# Altium PCB PCB_OSHW_BiDi_SDI_Fiber_Converter_V4_Normal_2024-11-17.pcbdoc
Units mm, origin at the board's own origin, x right, y up, seen from the top; angles counter-clockwise.
Board outline 134.06 x 77.94 mm, 2 copper layers (Top Layer, Bottom Layer); 117 components, 56 nets, 245 pads, 146 vias.
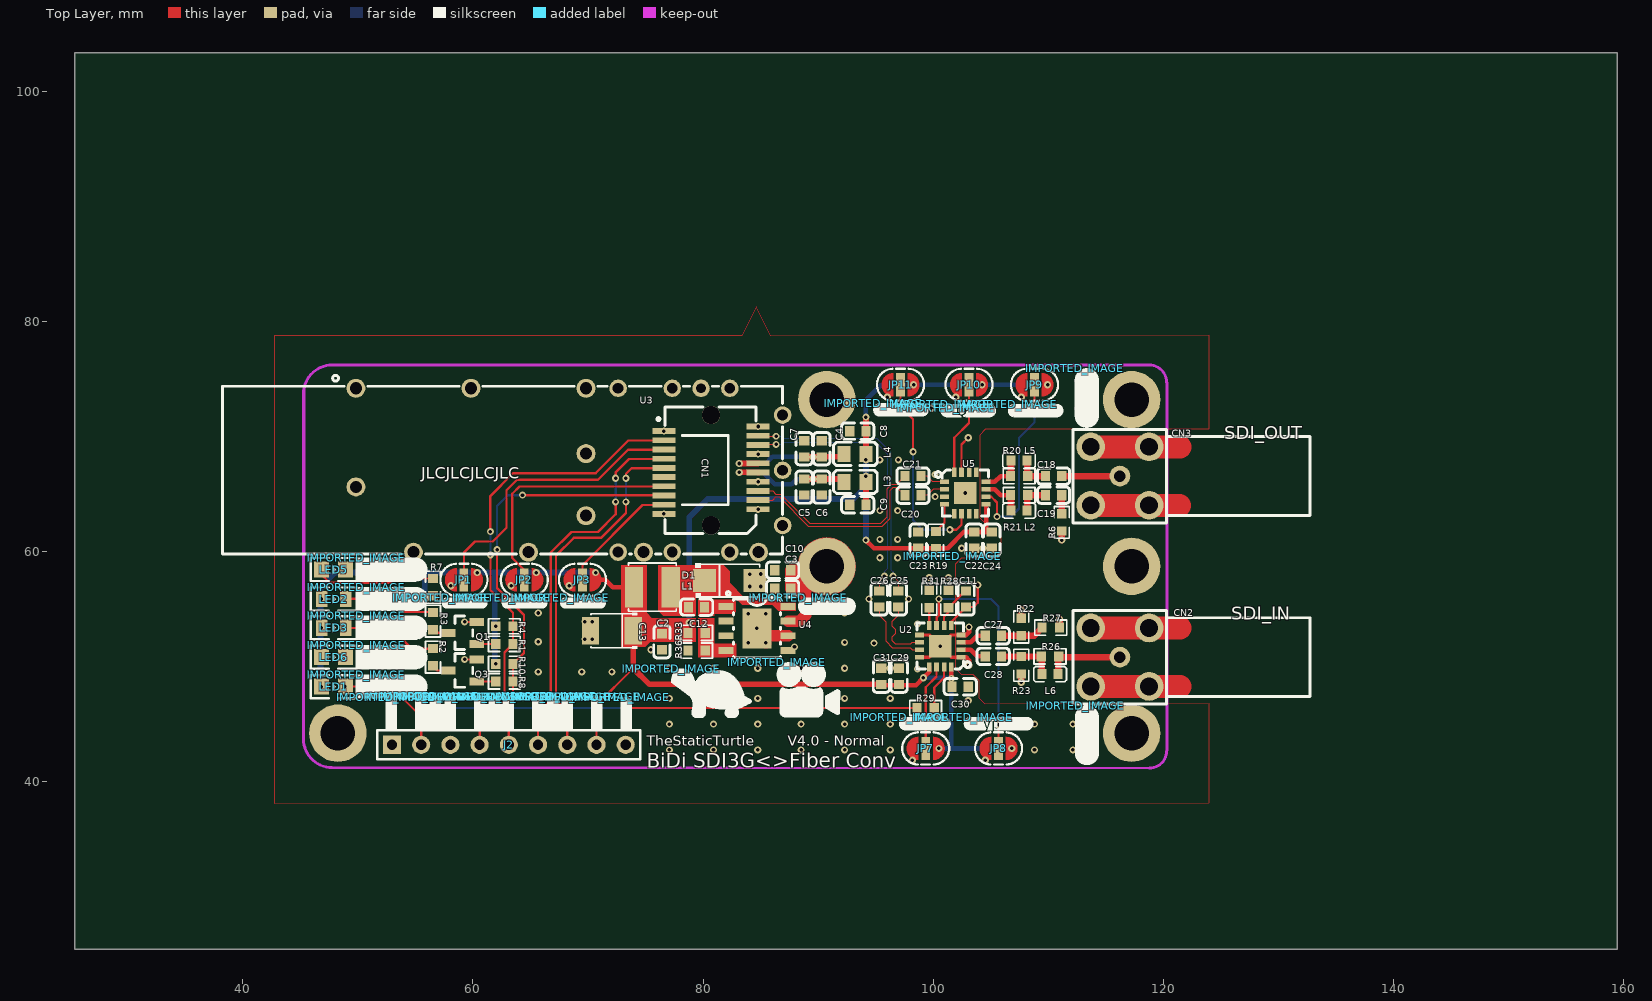
[diagram p0: Top Layer view]
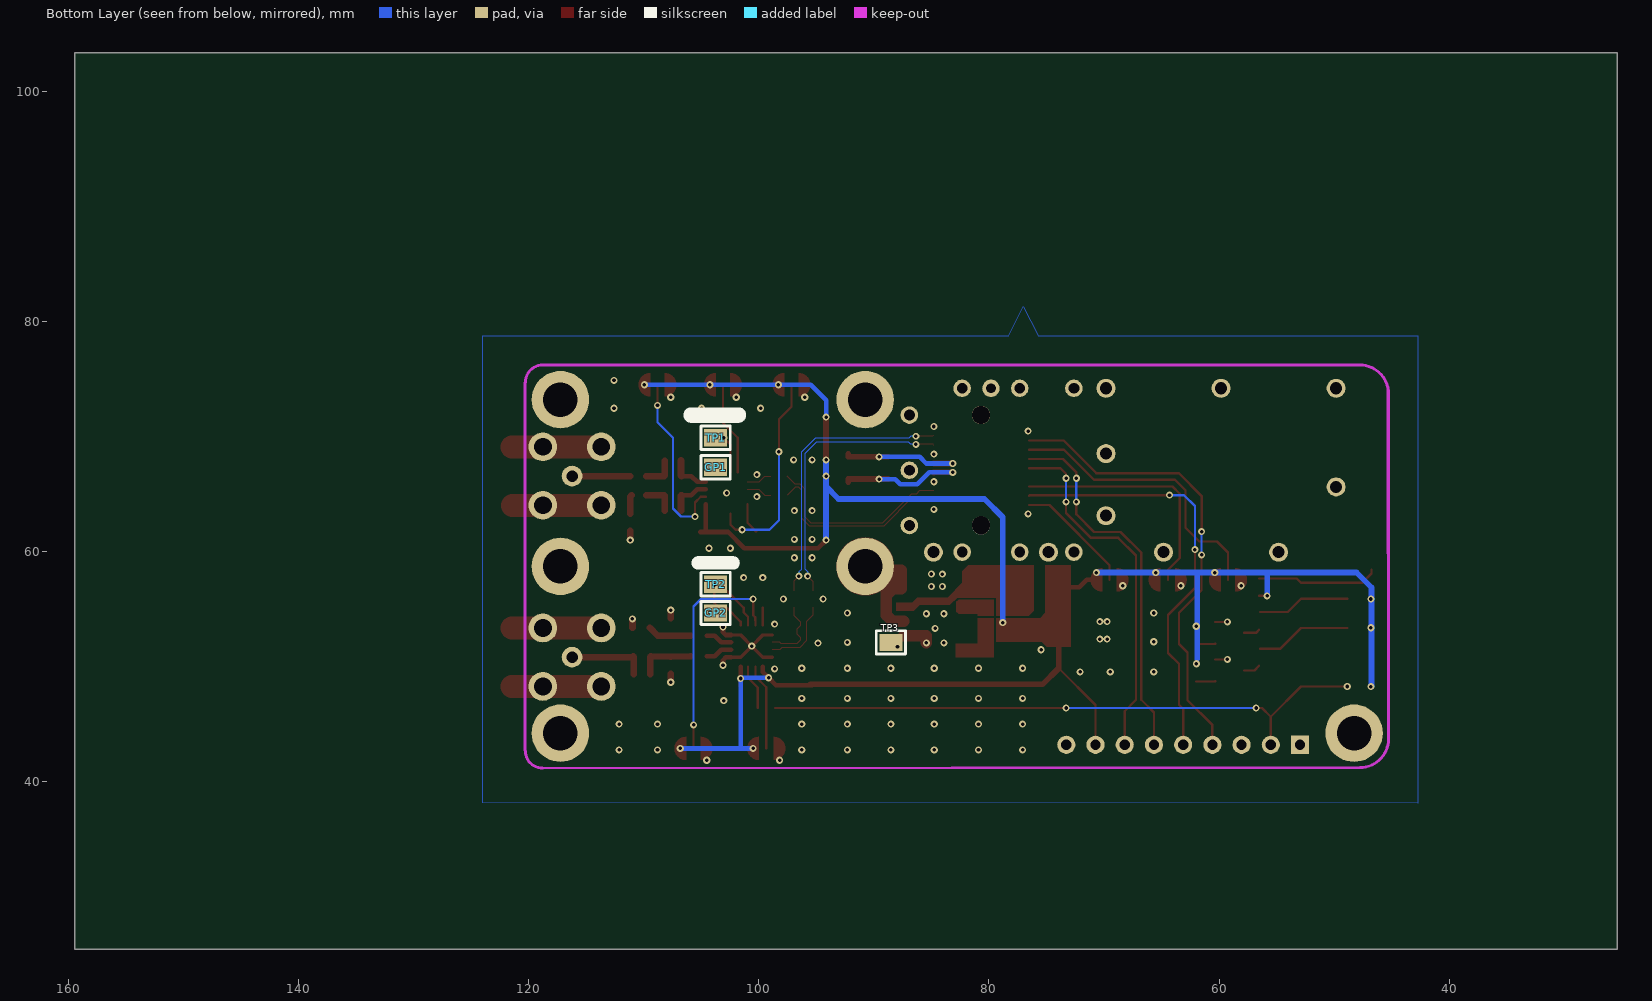
[diagram p1: Bottom Layer view, seen from below]

## Layer stack, top to bottom
Top Layer: signal copper (thickness not stored)
Dielectric: dielectric 0.32, FR-4, Dk 4.8
Bottom Layer: signal copper (thickness not stored)

## Board outline
159.461,25.4 25.4,25.4 25.4,103.338 159.461,103.338

## Components (designator, comment, footprint, x,y, rotation, side; value= is the part's Value field where it differs from the comment)
C2 "100n" C0603 76.433,52.155 r90 top
C3 "100n" C0603 86.93,56.764 r0 top
C4 "10u" C0603 90.323,68.925 r270 top
C5 "100n" C0603 88.787,65.597 r90 top
C6 "10u" C0603 90.323,65.597 r90 top
C7 "100n" C0603 88.787,68.925 r270 top
C8 "100n" C0603 93.459,70.461 r0 top
C9 "10u" C0603 93.459,64.061 r0 top
C10 "10u" C0603 86.93,58.364 r0 top
C11 "DNF" C0603 102.868,55.868 r90 top
C12 "10n" C0603 79.441,55.163 r180 top
C13 "100uF" CASE-B_3528 72.08,53.115 r180 top
C18 "4.7u" C0603 110.485,66.556 r0 top
C19 "4.7u" C0603 110.485,64.892 r0 top
C20 "4.7u" C0603 98.26,64.892 r0 top
C21 "4.7u" C0603 98.26,66.556 r0 top
C22 "10u" C0603 103.572,60.988 r90 top
C23 "10n" C0603 98.708,60.988 r270 top
C24 "100n" C0603 105.109,60.988 r90 top
C25 "4.7u" C0603 96.98,55.868 r270 top
C26 "4.7u" C0603 95.315,55.868 r270 top
C27 "1u" C0603 105.238,52.667 r0 top
C28 "1u" C0603 105.238,50.874 r0 top
C29 "10n" C0603 97.044,49.147 r270 top
C30 "10n" C0603 102.356,48.251 r180 top
C31 "10u" C0603 95.507,49.147 r270 top
CN1 "HC-SFP-20P" CONN-SMD_20P-P0.80_HCTL_HC-SFP-20P 80.696,67.064 r270 top
CN2 "SDI_IN" AMPHENOLRF_034-1030-12G 116.246,50.811 r0 top
CN3 "SDI_OUT" AMPHENOLRF_034-1030-12G 116.246,66.557 r0 top
D1 "SS34" SMA_L4.3-W2.6-LS5.2-RD 82.322,57.468 r0 top
GP1 "TEST-POINT-PTH-1X1" TESTPOINT-SMD_L1.6-W0.8_RCU-0C 103.764,67.325 r0 bottom
GP2 "TEST-POINT-PTH-1X1" TESTPOINT-SMD_L1.6-W0.8_RCU-0C 103.764,54.651 r0 bottom
IMPORTED_IMAGE "IMPORTED_IMAGE" IMPORTED_IMAGE 101.129,72.51 r0 top
IMPORTED_IMAGE "IMPORTED_IMAGE" IMPORTED_IMAGE 101.688,59.568 r0 top
IMPORTED_IMAGE "IMPORTED_IMAGE" IMPORTED_IMAGE 49.862,49.283 r0 top
IMPORTED_IMAGE "IMPORTED_IMAGE" IMPORTED_IMAGE 49.862,51.835 r0 top
IMPORTED_IMAGE "IMPORTED_IMAGE" IMPORTED_IMAGE 49.862,54.403 r0 top
IMPORTED_IMAGE "IMPORTED_IMAGE" IMPORTED_IMAGE 49.862,56.9 r0 top
IMPORTED_IMAGE "IMPORTED_IMAGE" IMPORTED_IMAGE 49.862,59.452 r0 top
IMPORTED_IMAGE "IMPORTED_IMAGE" IMPORTED_IMAGE 97.056,45.593 r0 top
IMPORTED_IMAGE "IMPORTED_IMAGE" IMPORTED_IMAGE 102.687,45.593 r0 top
IMPORTED_IMAGE "IMPORTED_IMAGE" IMPORTED_IMAGE 112.333,75.914 r0 top
IMPORTED_IMAGE "IMPORTED_IMAGE" IMPORTED_IMAGE 112.342,46.595 r0 top
IMPORTED_IMAGE "IMPORTED_IMAGE" IMPORTED_IMAGE 94.81,72.876 r0 top
IMPORTED_IMAGE "IMPORTED_IMAGE" IMPORTED_IMAGE 100.662,72.812 r0 top
IMPORTED_IMAGE "IMPORTED_IMAGE" IMPORTED_IMAGE 106.515,72.812 r0 top
IMPORTED_IMAGE "IMPORTED_IMAGE" IMPORTED_IMAGE 62.515,55.996 r0 top
IMPORTED_IMAGE "IMPORTED_IMAGE" IMPORTED_IMAGE 57.308,55.996 r0 top
IMPORTED_IMAGE "IMPORTED_IMAGE" IMPORTED_IMAGE 67.595,55.996 r0 top
IMPORTED_IMAGE "IMPORTED_IMAGE" IMPORTED_IMAGE 52.43,47.343 r0 top
IMPORTED_IMAGE "IMPORTED_IMAGE" IMPORTED_IMAGE 54.99,47.383 r0 top
IMPORTED_IMAGE "IMPORTED_IMAGE" IMPORTED_IMAGE 60.111,47.377 r0 top
IMPORTED_IMAGE "IMPORTED_IMAGE" IMPORTED_IMAGE 62.607,47.37 r0 top
IMPORTED_IMAGE "IMPORTED_IMAGE" IMPORTED_IMAGE 65.168,47.383 r0 top
IMPORTED_IMAGE "IMPORTED_IMAGE" IMPORTED_IMAGE 67.728,47.383 r0 top
IMPORTED_IMAGE "IMPORTED_IMAGE" IMPORTED_IMAGE 66.448,47.434 r0 top
IMPORTED_IMAGE "IMPORTED_IMAGE" IMPORTED_IMAGE 70.288,47.383 r0 top
IMPORTED_IMAGE "IMPORTED_IMAGE" IMPORTED_IMAGE 72.849,47.343 r0 top
IMPORTED_IMAGE "IMPORTED_IMAGE" IMPORTED_IMAGE 61.391,47.383 r0 top
IMPORTED_IMAGE "IMPORTED_IMAGE" IMPORTED_IMAGE 56.242,47.407 r0 top
IMPORTED_IMAGE "IMPORTED_IMAGE" IMPORTED_IMAGE 57.551,47.383 r0 top
IMPORTED_IMAGE "IMPORTED_IMAGE" IMPORTED_IMAGE 77.222,49.821 r0 top
IMPORTED_IMAGE "IMPORTED_IMAGE" IMPORTED_IMAGE 86.413,50.365 r0 top
IMPORTED_IMAGE "IMPORTED_IMAGE" IMPORTED_IMAGE 88.278,55.966 r0 top
J2 "HDR-M-2.54_1x9" HDR-M-2.54_1X9 63.119,43.194 r0 top
JP1 "SOLDER BRIDGE 3P" "SOLDER BRIDGE 3P" 59.215,57.532 r270 top
JP2 "SOLDER BRIDGE 3P" "SOLDER BRIDGE 3P" 64.464,57.532 r270 top
JP3 "SOLDER BRIDGE 3P" "SOLDER BRIDGE 3P" 69.52,57.532 r270 top
JP7 "SOLDER BRIDGE 3P" "SOLDER BRIDGE 3P" 99.357,42.874 r270 top
JP8 "SOLDER BRIDGE 3P" "SOLDER BRIDGE 3P" 105.694,42.874 r270 top
JP9 "SOLDER BRIDGE 3P" "SOLDER BRIDGE 3P" 108.821,74.494 r270 top
JP10 "SOLDER BRIDGE 3P" "SOLDER BRIDGE 3P" 103.124,74.494 r270 top
JP11 "SOLDER BRIDGE 3P" "SOLDER BRIDGE 3P" 97.172,74.494 r270 top
L1 "10uH" IND-SMD_L4.0-W4.0 75.601,56.892 r180 top
L2 "DNF" L0603 107.477,63.549 r180 top
L3 "100Ω" L0805 93.203,66.045 r180 top
L4 "100Ω" L0805 93.203,68.477 r180 top
L5 "DNF" L0603 107.477,67.901 r0 top
L6 "2.7n" L0603 110.166,49.34 r180 top
LED1 "LED_CD" LED0805_GREEN 47.885,48.251 r0 top
LED2 "LED_SFP_FAULT" LED0805_RED 47.885,55.868 r0 top
LED3 "LED_SFP_LOS" LED0805_RED 47.885,53.371 r0 top
LED5 "LED_POWER" LED0805_BLUE 47.885,58.428 r0 top
LED6 "LED_LOCK" LED0805_GREEN 47.885,50.811 r0 top
Q1 "2N3904(SOT-23)" SOT-23-3_L2.9-W1.3-P1.90-LS2.4-TR 59.087,52.923 r0 top
Q3 "2N3904(SOT-23)" SOT-23-3_L2.9-W1.3-P1.90-LS2.4-TR 59.087,49.659 r0 top
R1 "1k" R0603 62.735,51.963 r0 top
R2 "300" R0603 56.527,50.811 r270 top
R3 "300" R0603 56.527,53.947 r270 top
R4 "10k" R0603 62.735,53.499 r0 top
R6 "75" R0603 111.189,62.525 r270 top
R7 "300" R0603 56.527,56.892 r270 top
R8 "1k" R0603 62.735,48.699 r0 top
R10 "10k" R0603 62.735,50.235 r0 top
R19 "750" R0603 100.244,60.988 r90 top
R20 "25" R0603 107.477,66.557 r0 top
R21 "25" R0603 107.477,64.893 r0 top
R22 "75" R0603 107.668,53.434 r270 top
R23 "75" R0603 107.668,50.107 r90 top
R26 "75" R0603 110.165,50.874 r0 top
R27 "75" R0603 110.229,53.371 r0 top
R28 "1k" R0603 101.332,55.868 r270 top
R29 "DNF" R0603 99.356,46.393 r180 top
R31 "DNF" R0603 99.668,55.868 r90 top
R33 "10k" R0603 79.441,52.923 r0 top
R36 "5.6k" R0603 79.441,51.387 r180 top
TP1 "TEST-POINT-PTH-1X1" TESTPOINT-SMD_L1.6-W0.8_RCU-0C 103.764,69.885 r0 bottom
TP2 "TEST-POINT-PTH-1X1" TESTPOINT-SMD_L1.6-W0.8_RCU-0C 103.764,57.148 r0 bottom
TP3 "TEST-POINT-PTH-1X1" TESTPOINT-SMD_L1.6-W0.8_RCU-0C 88.531,52.091 r0 bottom
U2 "EQCO30R5" QFN16G-0.65-4X4MM 100.628,51.771 r180 top
U3 "HC-SFP-01L" TH_HC-SFP-01L 68.377,67.064 r0 top
U4 "TPS5430DDAR" ESOP-8_L4.9-W3.9-P1.27-LS6.0-TL-EP 84.69,53.307 r0 top
U5 "EQCO30T5" QFN16G-0.65-4X4MM 102.804,65.085 r0 top
? "" ? 129,54.809 r0 top
? "" ? 131.423,58.708 r0 top
? "" ? 128.984,62.588 r0 top
? "" ? 82.834,82.124 r0 top

## Footprints (in the part's own frame and the unit in brackets; to place one, negate y for a bottom-side part, rotate by r counter-clockwise, add the part's x,y. Pads: shape width x height; smd on the part's side, far side on the other; paste and mask are expansions set on the pad)
AMPHENOLRF_034-1030-12G [mm]
  round 1.8 hole 1 paste+0 mask+0.051: 1(0,0)
  round 2.5 hole 1.55 paste+0 mask+0.051: GND(-2.54,-2.54) GND(-2.54,2.54) GND(2.54,-2.54) GND(2.54,2.54)
  silkscreen extent -4.06,-4.06 16.51,4.06
C0603 [mm]
  rect 0.8x0.9 smd paste+0 mask+0.051: 1(-0.7,0) 2(0.7,0)
  silkscreen extent -1.41,-0.71 1.39,0.72
CASE-B_3528 [mm]
  rect 1.506x2.376 smd paste+0 mask+0.051: 1(-1.861,0) 2(1.861,0)
  silkscreen extent -2.21,-1.55 1.83,1.55
CONN-SMD_20P-P0.80_HCTL_HC-SFP-20P [mm]
  rect 0.5x2 smd paste+0 mask+0.051: 1(-3.4,-4.1) 2(-2.6,-4.1) 3(-1.8,-4.1) 4(-1,-4.1) 5(-0.2,-4.1) 6(0.6,-4.1) 7(1.4,-4.1) 8(2.2,-4.1) 9(3,-4.1) 10(3.8,-4.1) 11(3.4,4.1) 12(2.6,4.1) 13(1.8,4.1) 14(1,4.1) 15(0.2,4.1) 16(-0.6,4.1) 17(-1.4,4.1) 18(-2.2,4.1) 19(-3,4.1) 20(-3.8,4.1)
  round 1.6 hole 1.6 unplated paste+0: ""(-4.8,0) ""(4.8,0)
  silkscreen extent -5.5,-4.7 5.5,3.9
ESOP-8_L4.9-W3.9-P1.27-LS6.0-TL-EP [mm]
  rect 1.3x0.6 smd paste+0 mask+0.051: 1(-2.7,1.905) 2(-2.7,0.635) 3(-2.7,-0.635) 4(-2.7,-1.905) 5(2.7,-1.905) 6(2.7,-0.635) 7(2.7,0.635) 8(2.7,1.905)
  rect 2.5x3.5 smd paste+0 mask+0.051: 9(0,0)
  silkscreen extent -2.67,-2.55 2.05,3.2
HDR-M-2.54_1X9 [mil]
  rect 62x62 hole 35 paste+0 mask+2: 1(-400,0)
  round 62 hole 35 paste+0 mask+2: 2(-300,0) 3(-200,0) 4(-100,0) 5(0,0) 6(100,0) 7(200,0) 8(300,0) 9(400,0)
  silkscreen extent -450,-50 450,50
IMPORTED_IMAGE [mm]
IND-SMD_L4.0-W4.0 [mm]
  rect 1.6x3.5 smd paste+0 mask+0.051: 1(-1.6,0) 2(1.6,0)
  silkscreen extent -2.08,-2.1 2.08,2.1
L0603 [mm]
  rect 0.8x0.864 smd paste-100 mask+0.051: 1(-0.7,0) 2(0.7,0)
  silkscreen extent -1.42,-0.65 1.41,0.67
L0805 [mm]
  rect 1.133x1.377 smd paste-100 mask+0.051: 1(-0.966,0) 2(0.966,0)
  silkscreen extent -1.95,-1.02 1.86,1.02
LED0805_BLUE [mm]
  rect 1.3x1.4 smd paste+0 mask+0.051: 1(-1.05,0) 2(1.05,0)
  silkscreen extent -2,-1 2.3,1
LED0805_GREEN [mm]
  rect 1.3x1.4 smd paste+0 mask+0.051: 1(-1.05,0) 2(1.05,0)
  silkscreen extent -2,-1 2.3,1
LED0805_RED [mm]
  rect 1x1.4 smd paste+0 mask+0.051: 1(-1.05,0) 2(1.05,0)
  silkscreen extent -2,-1 2.3,1
QFN16G-0.65-4X4MM [mil]
  rect 31.5x15.7 smd paste+0 mask+2: 1(-71,38) 2(-71,13) 3(-71,-13) 4(-71,-38) 9(71,-38) 10(71,-13) 11(71,13) 12(71,38)
  rect 15.7x31.5 smd paste+0 mask+2: 5(-38,-71) 6(-13,-71) 7(13,-71) 8(38,-71) 13(38,71) 14(13,71) 15(-13,71) 16(-38,71)
  rect 76.8x76.8 smd paste+0 mask+2: 17(0,0)
  silkscreen extent -103,-79 79,79
R0603 [mm]
  rect 0.806x0.864 smd paste-100 mask+0.051: 1(-0.753,0) 2(0.753,0)
  silkscreen extent -1.39,-0.66 1.39,0.66
SMA_L4.3-W2.6-LS5.2-RD [mm]
  rect 2x2 smd paste+0 mask+0.051: 1(-2.2,0) 2(2.2,0)
  silkscreen extent -2.98,-1.5 2.6,1.5
"SOLDER BRIDGE 3P" [mm]
  rect 2x0.75 smd paste+0 mask+0.051: 2(0,0)
  Top Layer region: 1,-0.643 0.999,-0.689 0.996,-0.735 0.99,-0.781 0.983,-0.827 0.973,-0.872 0.962,-0.917 0.948,-0.961 0.932,-1.004 0.915,-1.047 0.895,-1.089 0.874,-1.13 0.85,-1.169 0.825,-1.208 0.798,-1.246 0.769,-1.282 0.739,-1.317 0.707,-1.35 0.674,-1.382 0.639,-1.412 0.603,-1.441 0.565,-1.468 0.526,-1.493 0.487,-1.517 0.446,-1.538 0.404,-1.558 0.361,-1.575 0.318,-1.591 0.274,-1.605 0.229,-1.616 0.184,-1.626 0.138,-1.633 0.092,-1.639 0.046,-1.642 0,-1.643 -0.046,-1.642 -0.092,-1.639 -0.138,-1.633 -0.184,-1.626 -0.229,-1.616 -0.274,-1.605 -0.318,-1.591 -0.361,-1.575 -0.404,-1.558 -0.446,-1.538 -0.487,-1.517 -0.526,-1.493 -0.565,-1.468 -0.603,-1.441 -0.639,-1.412 -0.674,-1.382 -0.707,-1.35 -0.739,-1.317 -0.769,-1.282 -0.798,-1.246 -0.825,-1.208 -0.85,-1.169 -0.874,-1.13 -0.895,-1.089 -0.915,-1.047 -0.932,-1.004 -0.948,-0.961 -0.962,-0.917 -0.973,-0.872 -0.983,-0.827 -0.99,-0.781 -0.996,-0.735 -0.999,-0.689 -1,-0.643
  Top Layer region: 1,0.643 0.999,0.689 0.996,0.735 0.99,0.781 0.983,0.827 0.973,0.872 0.962,0.917 0.948,0.961 0.932,1.004 0.915,1.047 0.895,1.089 0.874,1.13 0.85,1.169 0.825,1.208 0.798,1.246 0.769,1.282 0.739,1.317 0.707,1.35 0.674,1.382 0.639,1.412 0.603,1.441 0.565,1.468 0.526,1.493 0.487,1.517 0.446,1.538 0.404,1.558 0.361,1.575 0.318,1.591 0.274,1.605 0.229,1.616 0.184,1.626 0.138,1.633 0.092,1.639 0.046,1.642 0,1.643 -0.046,1.642 -0.092,1.639 -0.138,1.633 -0.184,1.626 -0.229,1.616 -0.274,1.605 -0.318,1.591 -0.361,1.575 -0.404,1.558 -0.446,1.538 -0.487,1.517 -0.526,1.493 -0.565,1.468 -0.603,1.441 -0.639,1.412 -0.674,1.382 -0.707,1.35 -0.739,1.317 -0.769,1.282 -0.798,1.246 -0.825,1.208 -0.85,1.169 -0.874,1.13 -0.895,1.089 -0.915,1.047 -0.932,1.004 -0.948,0.961 -0.962,0.917 -0.973,0.872 -0.983,0.827 -0.99,0.781 -0.996,0.735 -0.999,0.689 -1,0.643
  silkscreen extent -1.4,-2.04 1.4,2.04
SOT-23-3_L2.9-W1.3-P1.90-LS2.4-TR [mm]
  rect 1.25x0.7 smd paste+0 mask+0.051: 1(1.25,0.95) 2(1.25,-0.95) 3(-1.25,0)
  silkscreen extent -0.65,-1.46 0.9,1.46
TESTPOINT-SMD_L1.6-W0.8_RCU-0C [mm]
  rect 2x1.5 smd paste+0 mask+0.05: 1(0,0)
  silkscreen extent -1.27,-1.02 1.27,1.02
TH_HC-SFP-01L [mm]
  round 1.65 hole 1.05 paste+0 mask+0.05: 1(-18.55,7.125) 2(-8.55,7.125) 3(1.45,7.125) 11(16.45,-7.125) 14(6.45,-7.125) 16(-3.55,-7.125) 17(-13.55,-7.125) 18(-18.55,-1.455) 19(1.45,-3.955) 20(1.45,1.445)
  round 1.524 hole 0.95 paste+0 mask+0.05: 4(4.25,7.125) 5(8.95,7.125) 7(13.95,7.125) 8(18.55,4.795) 9(18.55,-0.005) 10(18.55,-4.805) 12(13.95,-7.125) 13(8.95,-7.125) 15(4.25,-7.125)
  round 1.524 hole 0.85 paste+0 mask+0.05: 6(11.45,7.125)
  Keep-Out Layer lines w0.254: -23.05,-7.239 -23.05,7.239
  silkscreen extent -30.15,-7.3 18.55,8.25
? [mm]

## Free pads (board coordinates)
  round 5 hole 3 paste+0 mask+0.051: 1(48.258,44.2) 1(90.758,73.2) 1(90.758,58.7) 1(117.258,44.2) 1(117.258,58.7) 1(117.258,73.2)

## Via types
v1: diameter 0.62, hole 0.31, Top Layer to Bottom Layer, tented both sides, 142 vias
v2: diameter 0.6, hole 0.3, Top Layer to Bottom Layer, tented both sides, 4 vias

## Nets (pads, with @x,y where several pads share a name; then routed paths per layer and width w, separated by ;. In a path a pad name is that pad's centre, name@x,y a point inside that pad or via, vN(x,y) a via of type N, cw(c..) or ccw(c..) an arc to the next point about the centre after c; other vN are vias at no path point)
+3.3V: C2.2 C8.2 C9.2 C13.1 C22.2 C23.2 C24.2 C29.2 C30.2 C31.2 J2.8 L1.2 L3.1 L4.1 LED1.1 LED2.1 LED3.1 R4.1 R7.2 R10.1 R19.1 R33.1 U2.13 U2.16 U5.9 | length 184.3
  Top Layer w0.2: v1(55.822,56.138) R7.2 ; v1(61.967,50.235) R10.1 ; R4.1@61.967,53.499 v1(61.982,53.499) ; J2.8@70.739,43.193 70.739,46.652 73.94,49.853 C13.1@73.94,53.114
  Top Layer w0.4: v1(46.797,48.251) LED1.1 ; v1(46.797,53.371) LED3.1 ; v1(46.797,55.868) LED2.1 ; 70.663,57.531 71.504,57.531 72.144,56.891 L1.2 ; v1(94.163,60.988) 94.864,60.287 98.707,60.287 101.273,60.287 102.672,61.689 C24.2 104.608,61.689 U5.9 ; C31.2@95.379,48.383 98.52,48.383 v1(99.156,49.019) 99.663,49.526 U2.13 ; v1(101.588,48.955) 101.588,48.251 U2.16
  Top Layer w0.5: C13.1@73.942,53.114 73.942,49.845 75.342,48.446 C31.2@95.507,48.446 ; C9.2@94.159,64.061 94.159,66.553 v1(94.163,66.557) ; C8.2@94.159,70.461 94.163,70.465 v1(94.163,71.678) v1(94.163,67.965)
  Bottom Layer w0.4: v1(94.163,71.678) 94.163,73.15 95.507,74.494 v1(98.315,74.494) v1(109.964,74.494) ; v1(99.156,49.019) 101.524,49.019 v1(101.588,48.955) ; v1@100.501,42.873 101.588,42.873 v1@101.588,48.954 ; v1(100.5,42.874) 104.907,42.874 v1(106.837,42.874)
  Bottom Layer w0.5: v1@46.747,55.88 46.747,56.86 48.053,58.166 55.8,58.166 ; v1@46.748,48.26 v1@46.748,55.88 ; 61.904,50.673 61.904,53.848 61.903,58.166 v1(60.372,58.166) ; v1(70.659,58.166) v1(65.502,58.166) v1(60.372,58.166) ; v1(78.801,53.819) 78.801,62.972 80.401,64.572 93.076,64.572 94.163,65.662 v1@94.163,66.556 ; v1(94.163,60.988) v1(94.163,66.557) v1(94.163,67.965) ; 55.8,58.166 55.8,56.142 55.8,58.166 ; 55.8,58.166 v1(60.372,58.166)
  other v1: 104.267,74.494
C12_1: C12.1 U4.1
GND: C2.1 C3.1 C4.1 C5.1 C6.1 C7.1 C8.1 C9.1 C10.1 C13.2 C22.1 C23.1 C24.1 C29.1 C30.1 C31.1 CN1.1 CN1.10 CN1.11 CN1.14 CN1.17 CN1.20 CN2.GND CN3.GND D1.2 GP1.1 GP2.1 J2.1 J2.9 LED5.2 pad.1@48.258,44.2 pad.1@90.758,73.2 pad.1@117.258,44.2 pad.1@117.258,58.7 pad.1@117.258,73.2 Q1.1 Q3.1 R6.2 R22.1 R23.1 R27.2 R28.1 R31.2 R36.2 U2.1 U2.4 U2.9 U2.12 U2.17 U3.1 U3.2 U3.3 U3.4 U3.5 U3.6 U3.7 U3.8 U3.9 U3.10 U3.11 U3.12 U3.13 U3.14 U3.15 U3.16 U3.17 U3.18 U3.19 U3.20 U4.6 U4.9 U5.3 U5.17 | length 50
  Top Layer w0.2: v1(59.279,50.619) Q3.1@60.335,50.61 ; v1(59.279,53.883) Q1.1@60.335,53.874
  Top Layer w0.3: U2.12 99.663,50.806 v1(100.628,51.771) ; U2.9 99.663,52.736 v1(100.628,51.771) ; U2.1 101.593,50.806 v1(100.628,51.771) ; U2.4 101.593,52.736 v1(100.628,51.771)
  Top Layer w0.4: U2.1 102.873,50.8 103.124,50.549 v1(103.124,50.107) ; U2.4 102.873,52.736 103.124,52.987 v1(103.124,53.435)
  Top Layer w0.59: v1(107.669,48.635) R23.1@107.669,49.353 ; R22.1 v1(107.669,54.907) ; R27.2 110.997,53.386 v1(110.997,54.139) ; v1(111.189,60.988) R6.2@111.189,61.771
  Top Layer w1: v1(85.446,52.047) 85.446,52.672 U4.6@87.389,52.672
  Top Layer w2: CN3.GND@113.686,63.997 121.431,63.997 ; CN2.GND@113.706,48.271 121.451,48.271 ; CN2.GND@113.706,53.351 121.451,53.351 ; CN3.GND@113.706,69.097 121.451,69.097
  other v1: 98.205,41.85 104.542,41.85 77.073,42.746 80.914,42.746 84.754,42.746 88.531,42.746 92.307,42.746 96.275,42.746 108.821,42.746 112.149,42.746 77.073,44.986 80.914,44.986 84.754,44.986 88.531,44.986 92.307,44.986 96.275,44.986 108.821,44.986 112.149,44.986 103.06,47.034 77.073,47.226 80.914,47.226 84.754,47.226 88.531,47.226 92.307,47.226 96.275,47.226 65.68,49.531 69.456,49.531 72.08,49.531 98.644,49.787 77.073,49.851 80.914,49.851 84.754,49.851 88.531,49.851 92.307,49.851 96.275,49.851 75.473,51.451 94.867,52.027 83.922,52.047 92.307,52.091 65.68,52.155 69.725,52.375 70.36,52.375 84.684,53.317 98.644,53.691 69.725,53.899 70.36,53.899 83.922,54.587 85.446,54.587 65.68,54.651 92.307,54.651 94.419,55.868 97.876,55.868 84.05,56.956 85.01,56.956 58.086,57.023 63.311,57.02 68.368,57.02 99.668,57.724 101.332,57.724 84.05,58.036 85.01,58.044 95.379,59.452 96.916,59.452 102.484,60.284 104.34,60.284 95.379,61.052 96.916,61.052 76.596,63.264 95.379,63.549 96.916,63.549 84.796,63.664 100.18,64.765 102.804,65.085 84.796,66.064 100.18,66.685 95.379,67.965 96.98,67.965 84.796,68.464 76.596,70.464 84.796,70.864 99.86,72.446 104.981,72.446 112.598,72.446 96.019,73.406 101.972,73.406 107.669,73.406 112.598,74.878
I2C_SCK: CN1.5 J2.7 | length 31.3
  Top Layer w0.2: J2.7@68.199,43.193 68.199,46.114 67.216,47.099 67.216,59.645 68.753,61.181 71.12,61.181 73.297,63.355 v1@73.297,64.316 ; v1(73.297,66.365) 73.297,66.749 73.79,67.242 CN1.5@76.528,67.242
  Bottom Layer w0.2: v1(73.297,64.317) v1(73.297,66.365)
I2C_SDA: CN1.4 J2.6 | length 32.4
  Top Layer w0.2: J2.6@65.659,43.193 65.659,45.989 66.767,47.099 66.767,59.901 68.56,61.692 70.864,61.692 72.4,63.228 v1@72.4,64.316 ; v1(72.4,66.365) 72.4,66.876 73.566,68.042 CN1.4@76.528,68.042
  Bottom Layer w0.2: v1@72.4,64.317 v1(72.4,66.365)
  other v1: 72.4,64.317
L1_1: C12.2 D1.1 L1.1 U4.8
L6_1: CN2.1 L6.1 R26.2 | length 6.9
  Top Layer w0.56: L6.1 110.865,50.821 110.919,50.875 110.983,50.811 CN2.1
LED3_2: LED3.2 R2.1 | length 8.3
  Top Layer w0.2: LED3.2@48.85,53.34 52.879,53.34 54.664,51.554 R2.1@56.435,51.554
LED5_1: LED5.1 R7.1 | length 10.6
  Top Layer w0.2: LED5.1@46.747,58.42 46.747,58.075 47.545,57.277 52.879,57.277 53.247,57.645 R7.1
LFOUT: TP1.1 U5.15 | length 3.2
  Top Layer w0.2: U5.15 102.474,69.299 v1(103.06,69.885)
Q1_2: Q1.2 R1.1 | length 1.6
  Top Layer w0.2: Q1.2@60.335,51.974 R1.1
R2_2: Q3.3 R2.2 | length 1.5
  Top Layer w0.2: R2.2@56.525,50.059 56.924,49.66 Q3.3@57.836,49.66
R3_1: LED2.2 R3.1 | length 8.1
  Top Layer w0.2: LED2.2@48.85,55.88 52.879,55.88 54.029,54.729 R3.1@56.435,54.729
R3_2: Q1.3 R3.2 | length 1.4
  Top Layer w0.2: R3.2@56.525,53.193 56.797,52.924 Q1.3@57.836,52.924
R8_1: Q3.2 R8.1 | length 1.6
  Top Layer w0.2: Q3.2@60.335,48.71 R8.1
R28_2: C11.2 R28.2 U2.6 | length 3.8
  Top Layer w0.2: U2.6 100.948,54.331 101.331,54.714 101.331,55.113 102.784,56.569 C11.2
R29_1: R29.1 U2.15 | length 3.9
  Top Layer w0.2: R29.1@100.112,46.393 100.112,48.179 100.958,49.03 U2.15
R31_1: R31.1 U2.8 | length 1.5
  Top Layer w0.2: U2.8 R31.1@99.667,55.113
R36_1: R33.2 R36.1 U4.4
S$69064: 
S$80685: 
SDI_IN_BYPASS: JP8.2 U2.7 | length 20.2
  Top Layer w0.2: U2.7 100.308,54.267 100.501,54.46 v1(100.5,55.868) ; v1(105.685,44.922) 105.685,42.883 JP8.2@105.694,42.874
  Bottom Layer w0.2: v1(100.5,55.868) 105.045,55.868 105.685,55.227 v1(105.685,44.922)
SDI_IN_CABLE_DETECT: J2.2 LED1.2 R29.2 | length 53.6
  Top Layer w0.2: v1(48.849,48.26) 52.878,48.26 55.499,45.639 ; J2.2@55.499,43.193 55.499,45.639 ; v1(56.783,46.393) 56.254,46.393 55.499,45.639 ; v1(73.297,46.393) R29.2
  Bottom Layer w0.2: v1(56.783,46.393) v1(73.297,46.393)
SDI_IN_MUTE: JP7.2 U2.14 | length 7.5
  Top Layer w0.2: JP7.2@99.358,42.873 99.358,48.194 100.297,49.137 U2.14
SDI_IN_N: C27.2 R22.2 R27.1 | length 3.8
  Top Layer w0.56: C27.2@105.936,52.667 R22.2 108.786,52.682 R27.1
SDI_IN_P: C28.2 L6.2 R23.2 R26.1 | length 5
  Top Layer w0.56: C28.2@105.936,50.874 R23.2 R26.1@109.411,50.874 ; R26.1@109.412,50.875 109.465,50.821 L6.2
SDI_INA_N: C27.1 U2.3 | length 2.3
  Top Layer w0.4: U2.3 103.261,52.101 103.828,52.667 C27.1@104.537,52.667
SDI_INA_P: C28.1 U2.2 | length 2.3
  Top Layer w0.4: U2.2 103.261,51.44 103.83,50.874 C28.1@104.537,50.874
SDI_OUT_EN: JP11.2 U5.6 | length 17.9
  Top Layer w0.2: JP11.2@97.171,74.493 97.171,72.573 98.26,71.486 v1(98.26,68.669) ; v1(101.46,61.884) 102.036,61.884 102.474,62.322 U5.6
  Bottom Layer w0.2: v1(98.26,68.669) 98.26,62.716 99.092,61.884 v1(101.46,61.884)
SDI_OUT_EQDIS: JP10.2 U5.16 | length 8.1
  Top Layer w0.2: U5.16 101.839,69.881 103.124,71.166 JP10.2
SDI_OUT_N: C19.2 R6.1 | length 1.7
  Top Layer w0.59: C19.2@111.057,64.893 111.189,64.761 R6.1@111.189,63.278
SDI_OUT_P: C18.2 CN3.1 | length 5.1
  Top Layer w0.56: C18.2@111.185,66.557 CN3.1
SDI_OUT_SD_HD: JP9.2 U5.10 | length 15.9
  Top Layer w0.2: U5.10 105.054,64.755 105.557,64.253 v1(105.557,63.036) ; v1(108.821,72.702) JP9.2
  Bottom Layer w0.2: v1(105.557,63.036) 106.773,63.036 107.478,63.742 107.478,69.886 108.821,71.229 v1(108.821,72.702)
SDI_OUTA_N: L2.2 R21.1 U5.11 | length 3.7
  Top Layer w0.4: U5.11 105.354,65.415 105.878,64.892 R21.1
  Top Layer w0.59: R21.1 106.777,64.839 L2.2
SDI_OUTA_P: L5.1 R20.1 U5.12 | length 3.7
  Top Layer w0.4: U5.12 105.37,66.05 105.875,66.556 R20.1@106.724,66.556
  Top Layer w0.59: R20.1@106.724,66.557 106.777,66.61 L5.1
SDI_OUTB_N: C19.1 L2.1 R21.2 | length 2.9
  Top Layer w0.56: L2.1 108.177,64.839 R21.2 C19.1
SDI_OUTB_P: C18.1 L5.2 R20.2 | length 2.9
  Top Layer w0.56: L5.2 108.177,66.61 108.23,66.557 C18.1@109.785,66.557
SFP_IN_N: C25.2 U2.10 | length 6
  Top Layer w0.107: C25.2@96.98,55.167 96.98,54.458 96.403,53.881 96.403,53.564 96.724,53.244 96.724,52.86 96.467,52.604 96.403,52.538 96.403,52.284 96.724,51.964 98.07,51.964 98.207,52.101 U2.10
SFP_IN_P: C26.2 U2.11 | length 6.4
  Top Layer w0.107: C26.2@95.316,55.167 95.316,54.46 95.893,53.884 95.893,52.22 96.47,51.644 98.004,51.644 98.207,51.44 U2.11
SFP_OUT_N: C20.2 U5.2 | length 2.3
  Top Layer w0.107: C20.2 99.476,64.892 99.999,65.415 U5.2
SFP_OUT_P: C21.2 U5.1 | length 2.2
  Top Layer w0.107: C21.2 99.477,66.556 99.982,66.05 U5.1
SFP_RATE_SELECT0: CN1.7 JP2.2 | length 21.3
  Top Layer w0.2: JP2.2@64.436,57.531 64.436,58.42 63.42,59.436 63.42,65.024 64.037,65.641 CN1.7@76.528,65.641
SFP_RATE_SELECT1: CN1.9 JP3.2 | length 10.5
  Top Layer w0.2: JP3.2@69.515,57.531 69.515,58.806 74.75,64.041 CN1.9@76.528,64.041
SFP_RD+: C21.1 CN1.13 | length 17
  Top Layer w0.107: CN1.13 86.05,65.263 86.327,64.986 86.772,64.986 89.299,62.461 95.443,62.461 96.02,63.035 96.02,65.469 96.401,65.85 96.843,65.85 C21.1@97.559,66.556
SFP_RD-: C20.1 CN1.12 | length 17
  Top Layer w0.107: CN1.12 86.05,64.463 86.327,64.74 86.635,64.74 89.17,62.205 95.57,62.205 96.276,62.908 96.276,65.342 96.53,65.596 96.856,65.596 C20.1@97.559,64.892
SFP_RX_LOS: CN1.8 J2.5 R8.2 R10.2 | length 37.1
  Top Layer w0.2: v1(62.095,60.156) 62.095,56.823 64.435,54.483 64.435,51.166 63.489,50.235 R8.2@63.489,48.699 ; J2.5@63.119,43.193 63.119,46.31 63.488,46.678 R8.2 ; v1(64.309,64.897) 76.475,64.897 CN1.8@76.529,64.842
  Bottom Layer w0.2: v1(62.095,60.156) 62.095,63.954 63.039,64.897 v1(64.309,64.897)
SFP_TD+: C26.1 CN1.18 | length 24
  Top Layer w0.107: CN1.18@84.796,69.246 84.859,69.309 v2(86.354,69.309) ; C26.1 95.316,57.404 v2(95.763,57.852)
  Bottom Layer w0.107: v2(86.354,69.309) 86.802,69.309 86.995,69.502 94.996,69.502 96.02,68.479 96.02,58.491 95.763,58.235 v2(95.763,57.852)
SFP_TD-: C25.1 CN1.19 | length 24.4
  Top Layer w0.107: CN1.19@84.818,70.076 84.881,70.013 v2(86.354,70.013) ; v2(96.532,57.852) 96.98,57.404 C25.1
  Bottom Layer w0.107: v2(86.354,70.013) 86.802,70.013 86.993,69.822 95.123,69.822 96.34,68.606 96.34,58.428 96.533,58.235 v2(96.532,57.852)
SFP_TX_DISABLE: CN1.3 JP1.2 | length 25.3
  Top Layer w0.2: JP1.2@59.228,57.531 59.228,59.914 60.175,60.861 61.712,60.861 62.911,62.06 62.911,65.324 63.823,66.236 70.864,66.236 73.47,68.842 CN1.3@76.528,68.842
SFP_TX_FAULT: CN1.2 J2.4 R1.2 R4.2 | length 40.7
  Top Layer w0.2: J2.4@60.579,43.193 60.579,44.913 62.736,47.069 62.736,51.209 R1.2 ; v1(61.515,61.722) 61.514,64.824 63.503,66.812 70.673,66.812 73.5,69.642 CN1.2@76.528,69.642 ; v1(61.519,59.708) 61.519,56.636 63.489,54.666 63.489,53.499 R1.2@63.489,51.963
  Bottom Layer w0.2: v1(61.515,61.722) 61.519,61.717 v1(61.519,59.708)
TP2_1: C11.1 TP2.1 U2.5 | length 4.8
  Top Layer w0.2: U2.5 101.593,53.891 102.868,55.167 103.513,55.167 103.891,55.548 v1@103.891,57.084
  other v1: 103.892,57.084
TP3_1: TP3.1 U4.5
  other v1: 87.954,51.707
U5_4: R19.2 U5.4 | length 2.7
  Top Layer w0.2: R19.2 101.001,62.499 U5.4
VCC_SFPR: C5.2 C6.2 CN1.15 L3.2 | length 12.4
  Top Layer w0.5: v1(83.154,66.877) 84.783,66.877 CN1.15 ; C5.2 C6.2 92.238,66.297 L3.2
  Bottom Layer w0.4: v1@83.155,66.876 85.202,66.876 86.226,65.852 87.699,65.852 88.138,66.292 v1@89.556,66.292
  other v1: 89.555,66.293
VCC_SFPT: C4.2 C7.2 CN1.16 L4.2 | length 12
  Top Layer w0.5: v1(83.154,67.645) 84.777,67.645 CN1.16 ; C7.2 C4.2 ; C4.2 92.238,68.225 L4.2
  Bottom Layer w0.4: v1(83.154,67.645) 85.458,67.645 86.034,68.221 v1(89.555,68.221)
VIN: C3.2 C10.2 pad.1@90.758,58.7 U4.7 | length 27.3
  Top Layer w1: U4.7@87.389,53.942 88.397,53.942 88.916,54.46 88.916,56.188 ; pad.1@88.726,58.7 pad.1@88.916,58.511 ; C3.2 88.339,56.764 88.916,56.188 ; C3.2 88.916,58.049 pad.1@88.916,58.511 ; C3.2 C10.2 88.209,58.364 88.916,57.658 88.916,56.188 ; 88.916,56.188 pad.1@88.916,58.511 ; pad.1@92.791,58.7 ccw(c90.759,58.7) pad.1@92.791,58.7
pads on no net: CN1. CN1.6 J2.3 LED6.1 LED6.2 U4.2 U4.3 U5.5 U5.7 U5.8 U5.13 U5.14
copper on no net: | length 0

## Polygon pours and split planes (outlines as drawn)
GND on Bottom Layer (solid): 42.719,78.74 42.719,38.1 123.991,38.137 123.999,78.74 78.279,78.74 77.009,81.28 75.739,78.74
GND on Mid-Layer 2 (solid): 42.719,78.74 42.719,38.1 123.991,38.137 123.999,78.74 80.819,78.74 79.549,81.28 78.279,78.74
GND on Mid-Layer 1 (solid): 42.719,78.74 42.719,38.1 123.991,38.137 123.991,46.778 104.533,46.714 104.02,47.226 104.02,48.763 103.508,49.275 102.484,49.275 101.972,49.787 101.972,58.94 102.484,59.452 105.429,59.452 105.941,59.964 105.941,61.884 105.429,62.396 104.597,62.396 104.084,62.908 104.084,70.141 104.597,70.653 123.991,70.653 123.991,78.782 83.41,78.782 82.13,81.279 80.914,78.782
GND on Top Layer (solid): 42.719,78.74 42.719,38.1 123.991,38.137 123.991,46.778 104.533,46.714 104.02,47.226 104.02,48.763 103.508,49.275 102.484,49.275 101.972,49.787 101.972,58.94 102.484,59.452 105.429,59.452 105.941,59.964 105.941,61.884 105.429,62.396 104.597,62.396 104.084,62.908 104.084,70.141 104.597,70.653 112.213,70.653 123.991,70.653 123.991,78.782 85.899,78.74 84.629,81.28 83.359,78.74

## Keep-outs
Keep-Out Layer:
  lines w0.254: 45.263,43.708 ccw(c47.763,43.708) 47.763,41.208 ; 45.263,73.708 cw(c47.763,73.708) 47.763,76.208 ; 118.796,76.208 cw(c118.796,74.708) 120.296,74.708 ; 118.808,41.168 ccw(c118.808,42.668) 120.308,42.668

## Other copper
Top Layer:
  region net L1_1: 76.113,58.812 76.113,54.843 76.561,54.395 79.377,54.395 79.377,55.996 82.77,55.996 83.41,55.355 86.034,55.355 86.546,54.843 88.082,54.843 88.082,55.548 86.674,55.548 86.226,55.996 83.602,55.996 82.322,57.276 82.322,58.3 81.81,58.812
  region net +3.3V: 72.913,58.812 72.913,51.707 74.961,51.707 75.409,52.155 79.377,52.155 79.377,54.203 75.537,54.203 75.089,54.651 75.089,58.812
  region net R36_1: 79.569,54.203 79.569,50.811 82.898,50.811 82.898,51.963 80.978,51.963 80.978,54.203
  region net C12_1: 79.569,54.395 79.569,55.804 82.642,55.804 82.834,55.612 82.834,54.779 82.642,54.587 80.978,54.587 80.978,54.395

## Silkscreen, mask and mechanical layers (free items; w line width, h text height)
Top Overlay:
  region: 66.064,44.464 66.064,46.714 66.512,46.714 66.512,44.464
  region: 67.34,44.464 67.34,46.714 67.788,46.714 67.788,44.464
  region: 60.999,44.464 60.999,46.714 61.447,46.714 61.447,44.464
  region: 62.279,44.464 62.279,46.714 62.727,46.714 62.727,44.464
  region: 55.863,44.464 55.863,46.714 56.311,46.714 56.311,44.464
  region: 57.16,44.464 57.16,46.714 57.608,46.714 57.608,44.464
  text "JLCJLCJLCJLC" at 55.502,66.313 h1
  text "TheStaticTurtle" at 75.089,43.128 h0.9
  text "V4.0 - Normal" at 87.378,43.128 h0.9
  text "BiDi SDI3G<>Fiber Conv" at 75.089,41.21 h1.28
Top Solder:
  lines w2 net S$69064: 113.686,63.997 121.431,63.997 ; 113.706,48.271 121.451,48.271 ; 113.706,53.351 121.451,53.351 ; 113.706,69.097 121.451,69.097